# EAGLE board Thermistor-Connector-panel5x3 (EAGLE 6.6.0)
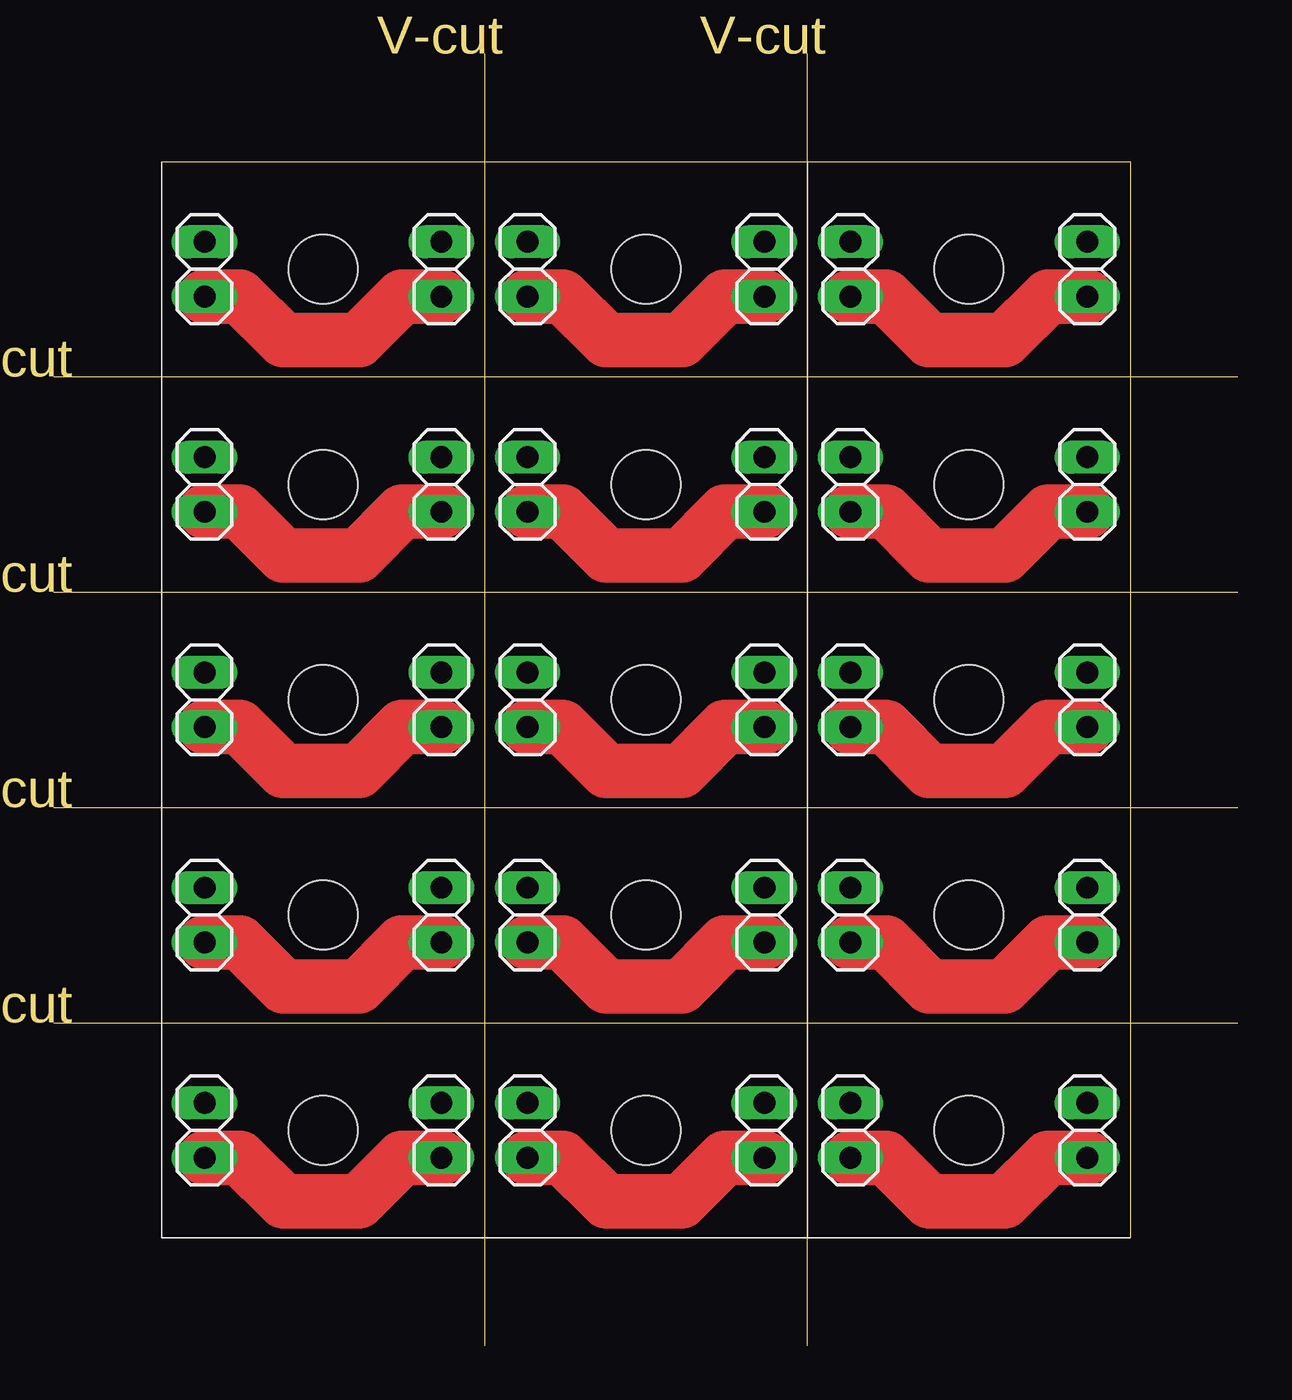
[diagram p0: board, top side]
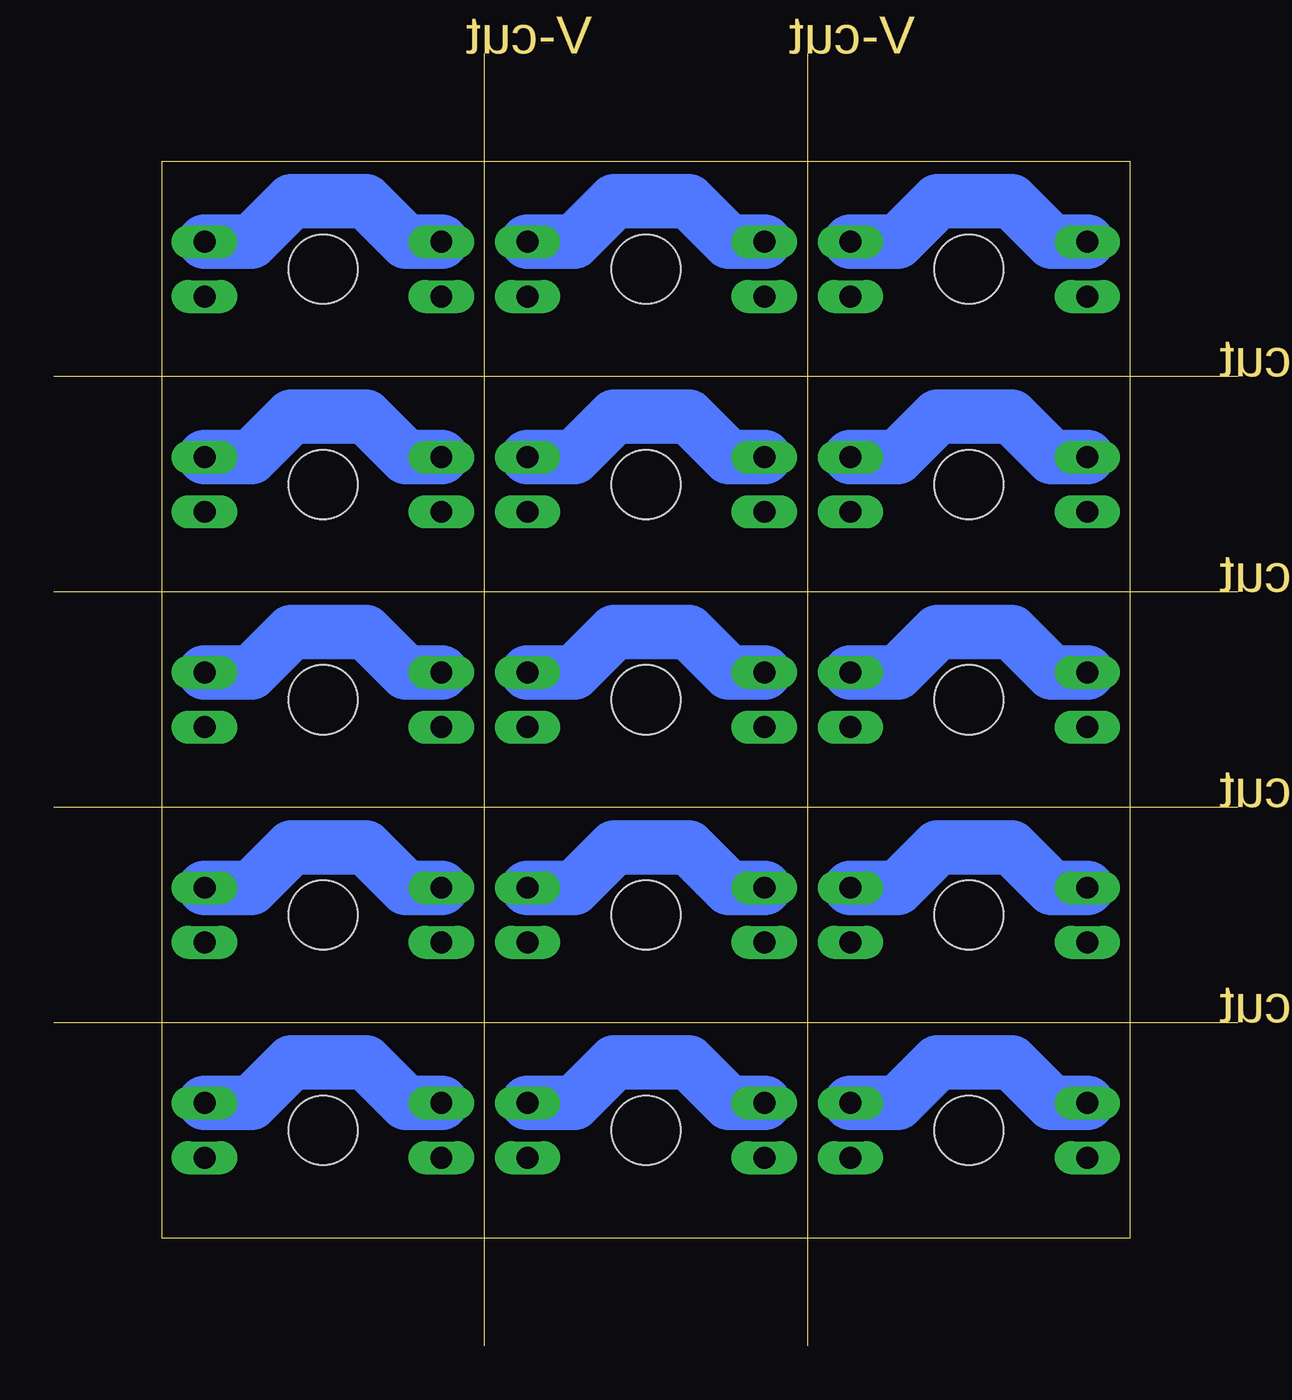
[diagram p1: board, bottom side, seen from below]

Size 55 x 60 mm. Coordinates in mm from the lower left corner, seen from the top.
Outline: 20,60 20,0
Outline: 35,0 35,60
Outline: 0,15 55,15
Outline: 0,25 55,25
Outline: 0,35 55,35
Outline: 0,45 55,45
Outline: 5,55 50,55 50,5 5,5 5,55
Copper layers (1*16): Top 0.035mm / dielectric 1.5mm / Bottom 0.035mm
Design rules "SeeedStudio_2layer_DRU_no_angle_20140221": minimum track width 6mil, minimum drill 12mil, track to track 6mil, track to pad 6mil, pad to pad 6mil, via to via 6mil, smd to smd 0mil, copper to edge 10mil, drill to drill 10mil, minimum pad ring 10mil, minimum via ring 6mil, stop-mask expansion 2mil, vias tented up to drill 100mil, thermal gap 10mil
Holes 3.2 mm at 12.5,10 12.5,20 12.5,30 12.5,40 12.5,50 27.5,10 27.5,20 27.5,30 27.5,40 27.5,50 42.5,50 42.5,40 42.5,30 42.5,20 42.5,10
tKeepout: area 10,7.5 to 15,12.5; area 10,17.5 to 15,22.5; area 10,27.5 to 15,32.5; area 10,37.5 to 15,42.5; area 10,47.5 to 15,52.5; area 25,7.5 to 30,12.5; area 25,17.5 to 30,22.5; area 25,27.5 to 30,32.5; area 25,37.5 to 30,42.5; area 25,47.5 to 30,52.5; area 40,7.5 to 45,12.5; area 40,17.5 to 45,22.5; 3 more areas

## Footprints (pad centres in the part's own frame; a part is rotated, then mirrored left to right if it is on the bottom)
1X02 = drill 1.016 long: 1 -1.27,0; 2 1.27,0

## Placement (x,y rotation side)
JP1  [1X02]  18,10 90 top
JP2  [1X02]  7,10 90 top
JP3  [1X02]  18,20 90 top
JP4  [1X02]  7,20 90 top
JP5  [1X02]  18,30 90 top
JP6  [1X02]  7,30 90 top
JP7  [1X02]  18,40 90 top
JP8  [1X02]  7,40 90 top
JP9  [1X02]  18,50 90 top
JP10  [1X02]  7,50 90 top
JP21  [1X02]  33,10 90 top
JP22  [1X02]  22,10 90 top
JP23  [1X02]  33,20 90 top
JP24  [1X02]  22,20 90 top
JP25  [1X02]  33,30 90 top
JP26  [1X02]  22,30 90 top
JP27  [1X02]  33,40 90 top
JP28  [1X02]  22,40 90 top
JP29  [1X02]  33,50 90 top
JP30  [1X02]  22,50 90 top
JP41  [1X02]  48,10 90 top
JP42  [1X02]  37,10 90 top
JP43  [1X02]  48,20 90 top
JP44  [1X02]  37,20 90 top
JP45  [1X02]  48,30 90 top
JP46  [1X02]  37,30 90 top
JP47  [1X02]  48,40 90 top
JP48  [1X02]  37,40 90 top
JP49  [1X02]  48,50 90 top
JP50  [1X02]  37,50 90 top

## Library data of the parts
JP1-JP10 JP21-JP30 JP41-JP50 = pinhead

## Nets
N$1: JP1.1 JP2.1
N$2: JP1.2 JP2.2
N$3: JP3.1 JP4.1
N$4: JP3.2 JP4.2
N$5: JP5.1 JP6.1
N$6: JP5.2 JP6.2
N$7: JP7.1 JP8.1
N$8: JP7.2 JP8.2
N$9: JP9.1 JP10.1
N$10: JP9.2 JP10.2
N$21: JP21.1 JP22.1
N$22: JP21.2 JP22.2
N$23: JP23.1 JP24.1
N$24: JP23.2 JP24.2
N$25: JP25.1 JP26.1
N$26: JP25.2 JP26.2
N$27: JP27.1 JP28.1
N$28: JP27.2 JP28.2
N$29: JP29.1 JP30.1
N$30: JP29.2 JP30.2
N$41: JP41.1 JP42.1
N$42: JP41.2 JP42.2
N$43: JP43.1 JP44.1
N$44: JP43.2 JP44.2
N$45: JP45.1 JP46.1
N$46: JP45.2 JP46.2
N$47: JP47.1 JP48.1
N$48: JP47.2 JP48.2
N$49: JP49.1 JP50.1
N$50: JP49.2 JP50.2

## Tracks (layer width: path | path; a pad name or v marks a point on that pad's centre or on a via)
N$1
  Top 2.54: JP2.1 8.64,8.73 10.67,6.7 14.15,6.7 16.18,8.73 JP1.1
N$2
  Bottom 2.54: JP2.2 8.64,11.27 10.52,13.15 13.95,13.15 15.83,11.27 JP1.2
N$3
  Top 2.54: JP4.1 8.64,18.73 10.67,16.7 14.15,16.7 16.18,18.73 JP3.1
N$4
  Bottom 2.54: JP4.2 8.64,21.27 10.52,23.15 13.95,23.15 15.83,21.27 JP3.2
N$5
  Top 2.54: JP6.1 8.64,28.73 10.67,26.7 14.15,26.7 16.18,28.73 JP5.1
N$6
  Bottom 2.54: JP6.2 8.64,31.27 10.52,33.15 13.95,33.15 15.83,31.27 JP5.2
N$7
  Top 2.54: JP8.1 8.64,38.73 10.67,36.7 14.15,36.7 16.18,38.73 JP7.1
N$8
  Bottom 2.54: JP8.2 8.64,41.27 10.52,43.15 13.95,43.15 15.83,41.27 JP7.2
N$9
  Top 2.54: JP10.1 8.64,48.73 10.67,46.7 14.15,46.7 16.18,48.73 JP9.1
N$10
  Bottom 2.54: JP10.2 8.64,51.27 10.52,53.15 13.95,53.15 15.83,51.27 JP9.2
N$21
  Top 2.54: JP22.1 23.64,8.73 25.67,6.7 29.15,6.7 31.18,8.73 JP21.1
N$22
  Bottom 2.54: JP22.2 23.64,11.27 25.52,13.15 28.95,13.15 30.83,11.27 JP21.2
N$23
  Top 2.54: JP24.1 23.64,18.73 25.67,16.7 29.15,16.7 31.18,18.73 JP23.1
N$24
  Bottom 2.54: JP24.2 23.64,21.27 25.52,23.15 28.95,23.15 30.83,21.27 JP23.2
N$25
  Top 2.54: JP26.1 23.64,28.73 25.67,26.7 29.15,26.7 31.18,28.73 JP25.1
N$26
  Bottom 2.54: JP26.2 23.64,31.27 25.52,33.15 28.95,33.15 30.83,31.27 JP25.2
N$27
  Top 2.54: JP28.1 23.64,38.73 25.67,36.7 29.15,36.7 31.18,38.73 JP27.1
N$28
  Bottom 2.54: JP28.2 23.64,41.27 25.52,43.15 28.95,43.15 30.83,41.27 JP27.2
N$29
  Top 2.54: JP30.1 23.64,48.73 25.67,46.7 29.15,46.7 31.18,48.73 JP29.1
N$30
  Bottom 2.54: JP30.2 23.64,51.27 25.52,53.15 28.95,53.15 30.83,51.27 JP29.2
N$41
  Top 2.54: JP42.1 38.64,8.73 40.67,6.7 44.15,6.7 46.18,8.73 JP41.1
N$42
  Bottom 2.54: JP42.2 38.64,11.27 40.52,13.15 43.95,13.15 45.83,11.27 JP41.2
N$43
  Top 2.54: JP44.1 38.64,18.73 40.67,16.7 44.15,16.7 46.18,18.73 JP43.1
N$44
  Bottom 2.54: JP44.2 38.64,21.27 40.52,23.15 43.95,23.15 45.83,21.27 JP43.2
N$45
  Top 2.54: JP46.1 38.64,28.73 40.67,26.7 44.15,26.7 46.18,28.73 JP45.1
N$46
  Bottom 2.54: JP46.2 38.64,31.27 40.52,33.15 43.95,33.15 45.83,31.27 JP45.2
N$47
  Top 2.54: JP48.1 38.64,38.73 40.67,36.7 44.15,36.7 46.18,38.73 JP47.1
N$48
  Bottom 2.54: JP48.2 38.64,41.27 40.52,43.15 43.95,43.15 45.83,41.27 JP47.2
N$49
  Top 2.54: JP50.1 38.64,48.73 40.67,46.7 44.15,46.7 46.18,48.73 JP49.1
N$50
  Bottom 2.54: JP50.2 38.64,51.27 40.52,53.15 43.95,53.15 45.83,51.27 JP49.2

## Text on the board
Dimension: V-cut | V-cut | V-cut | V-cut | V-cut | V-cut